# Altium PCB PCB1.PcbDoc
Units mm, origin at the board's own origin, x right, y up, seen from the top; angles counter-clockwise.
Board outline 200 x 200 mm, 4 copper layers (Top Layer, Internal Plane 1, Internal Plane 2, Bottom Layer), stack 0.462 mm thick; 21 components, 52 nets, 105 pads, 0 vias.
Unrouted connection lines stored in the file: 5.
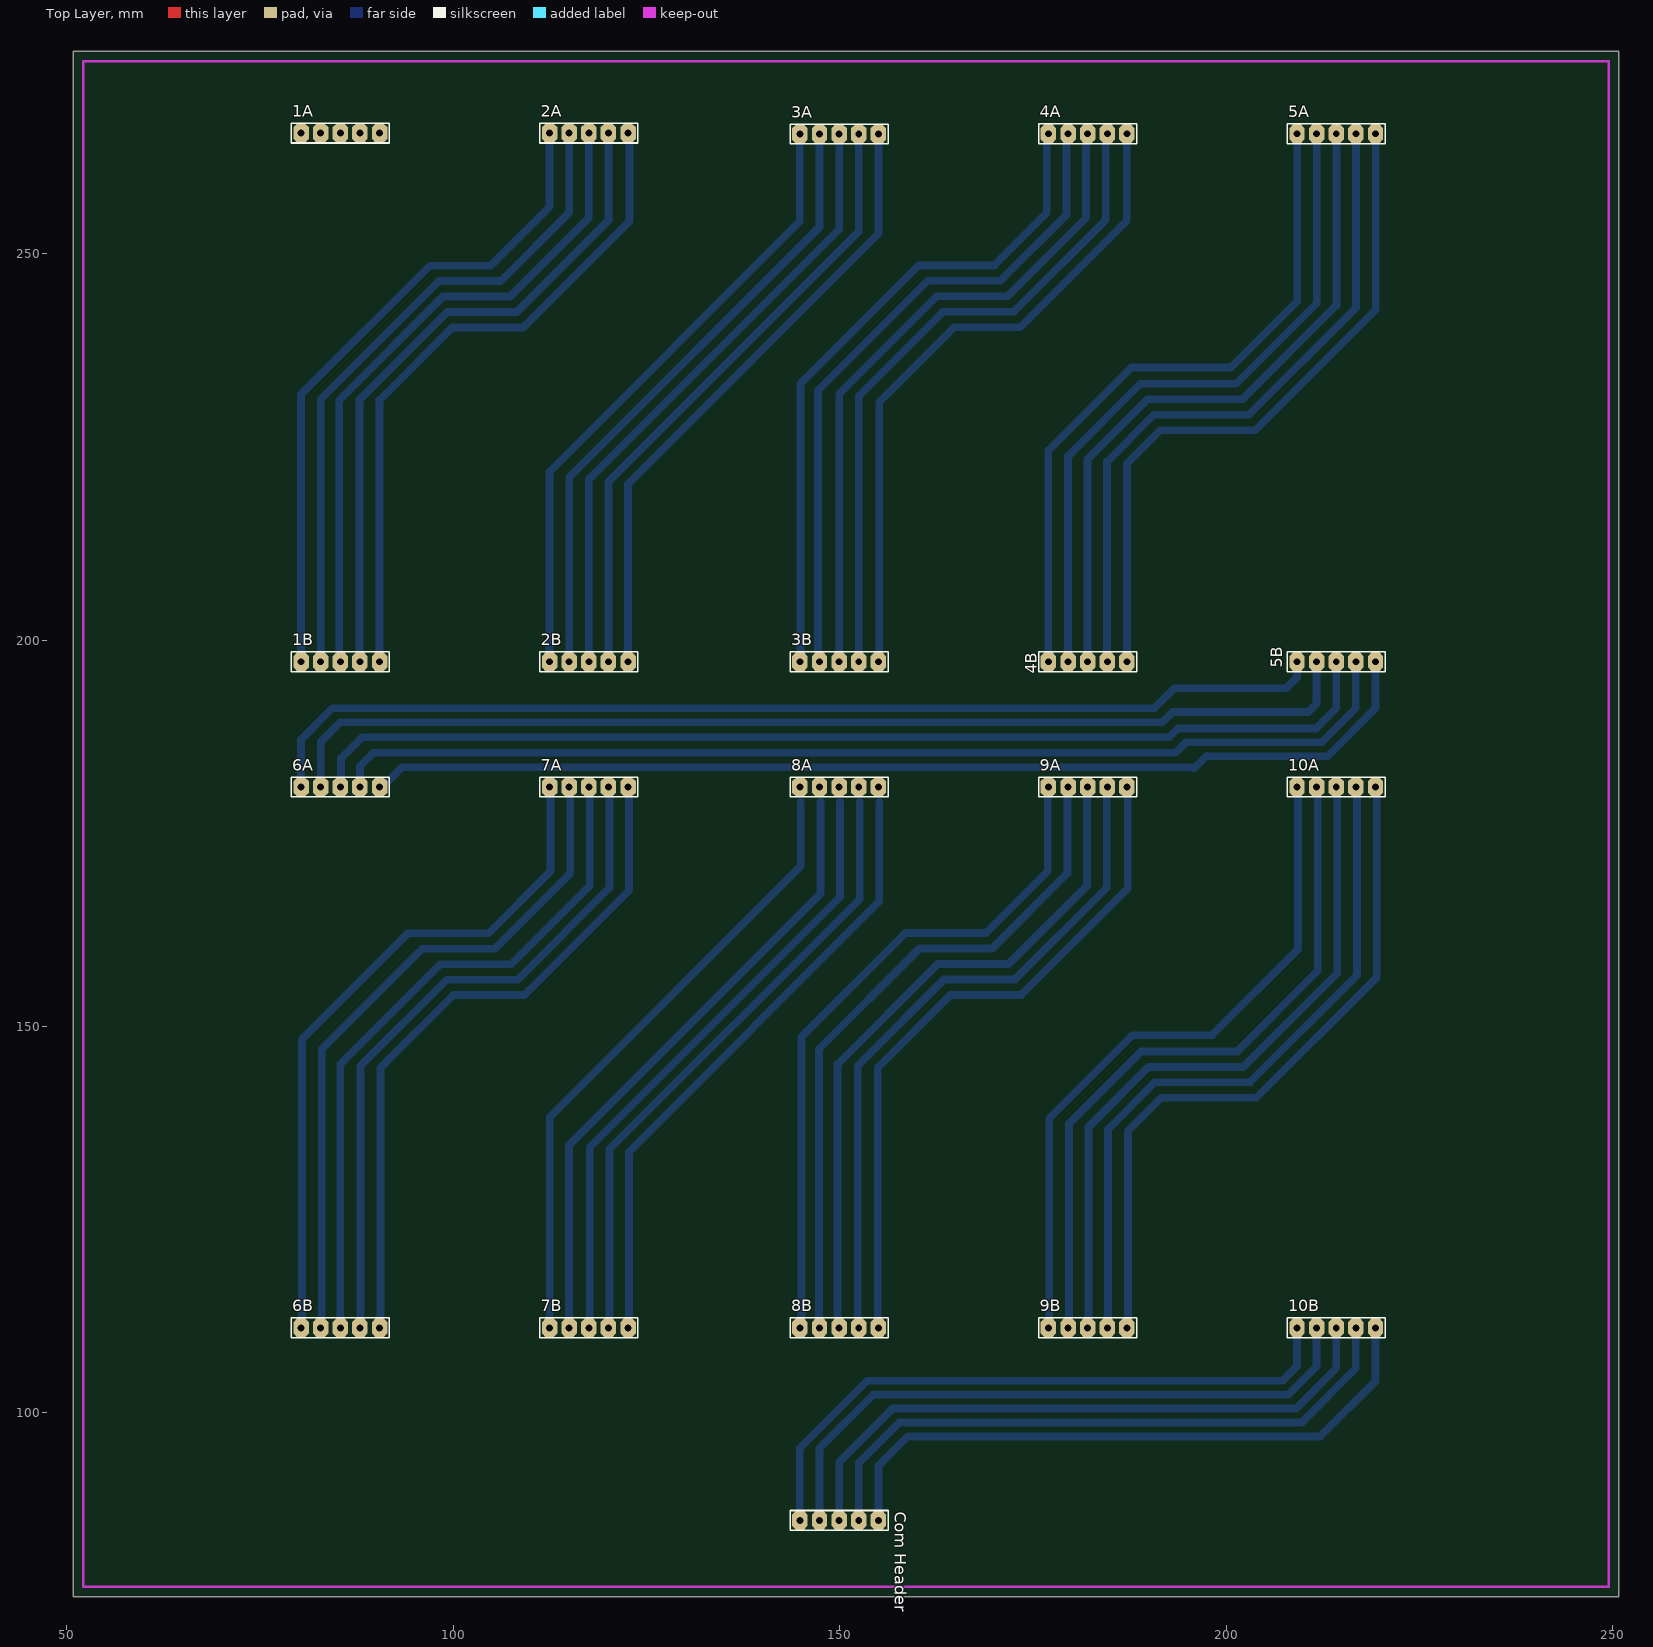
[diagram p0: Top Layer view]
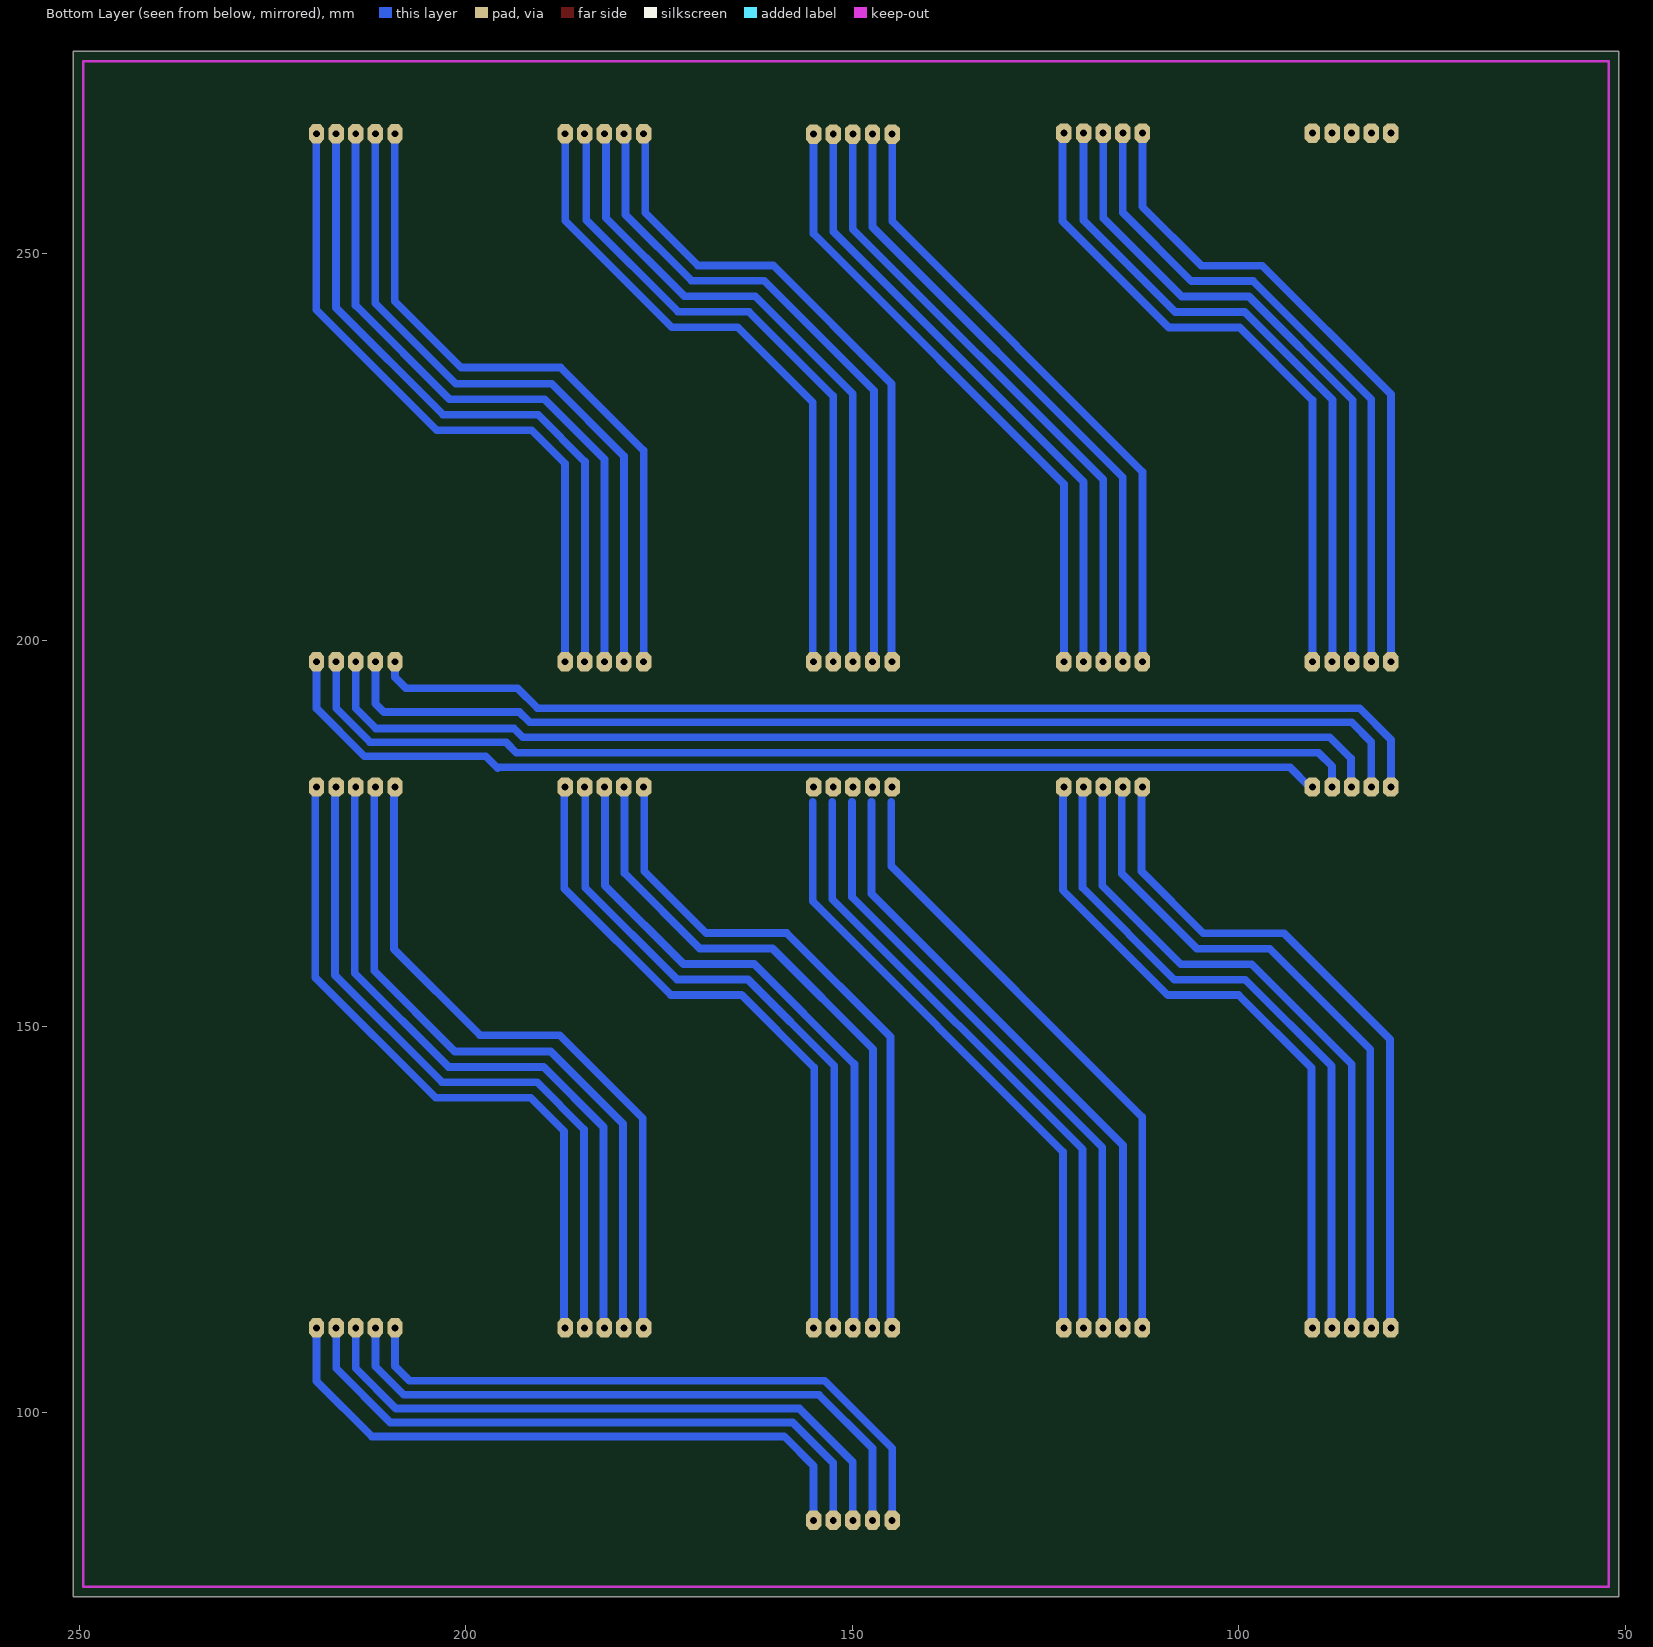
[diagram p1: Bottom Layer view, seen from below]
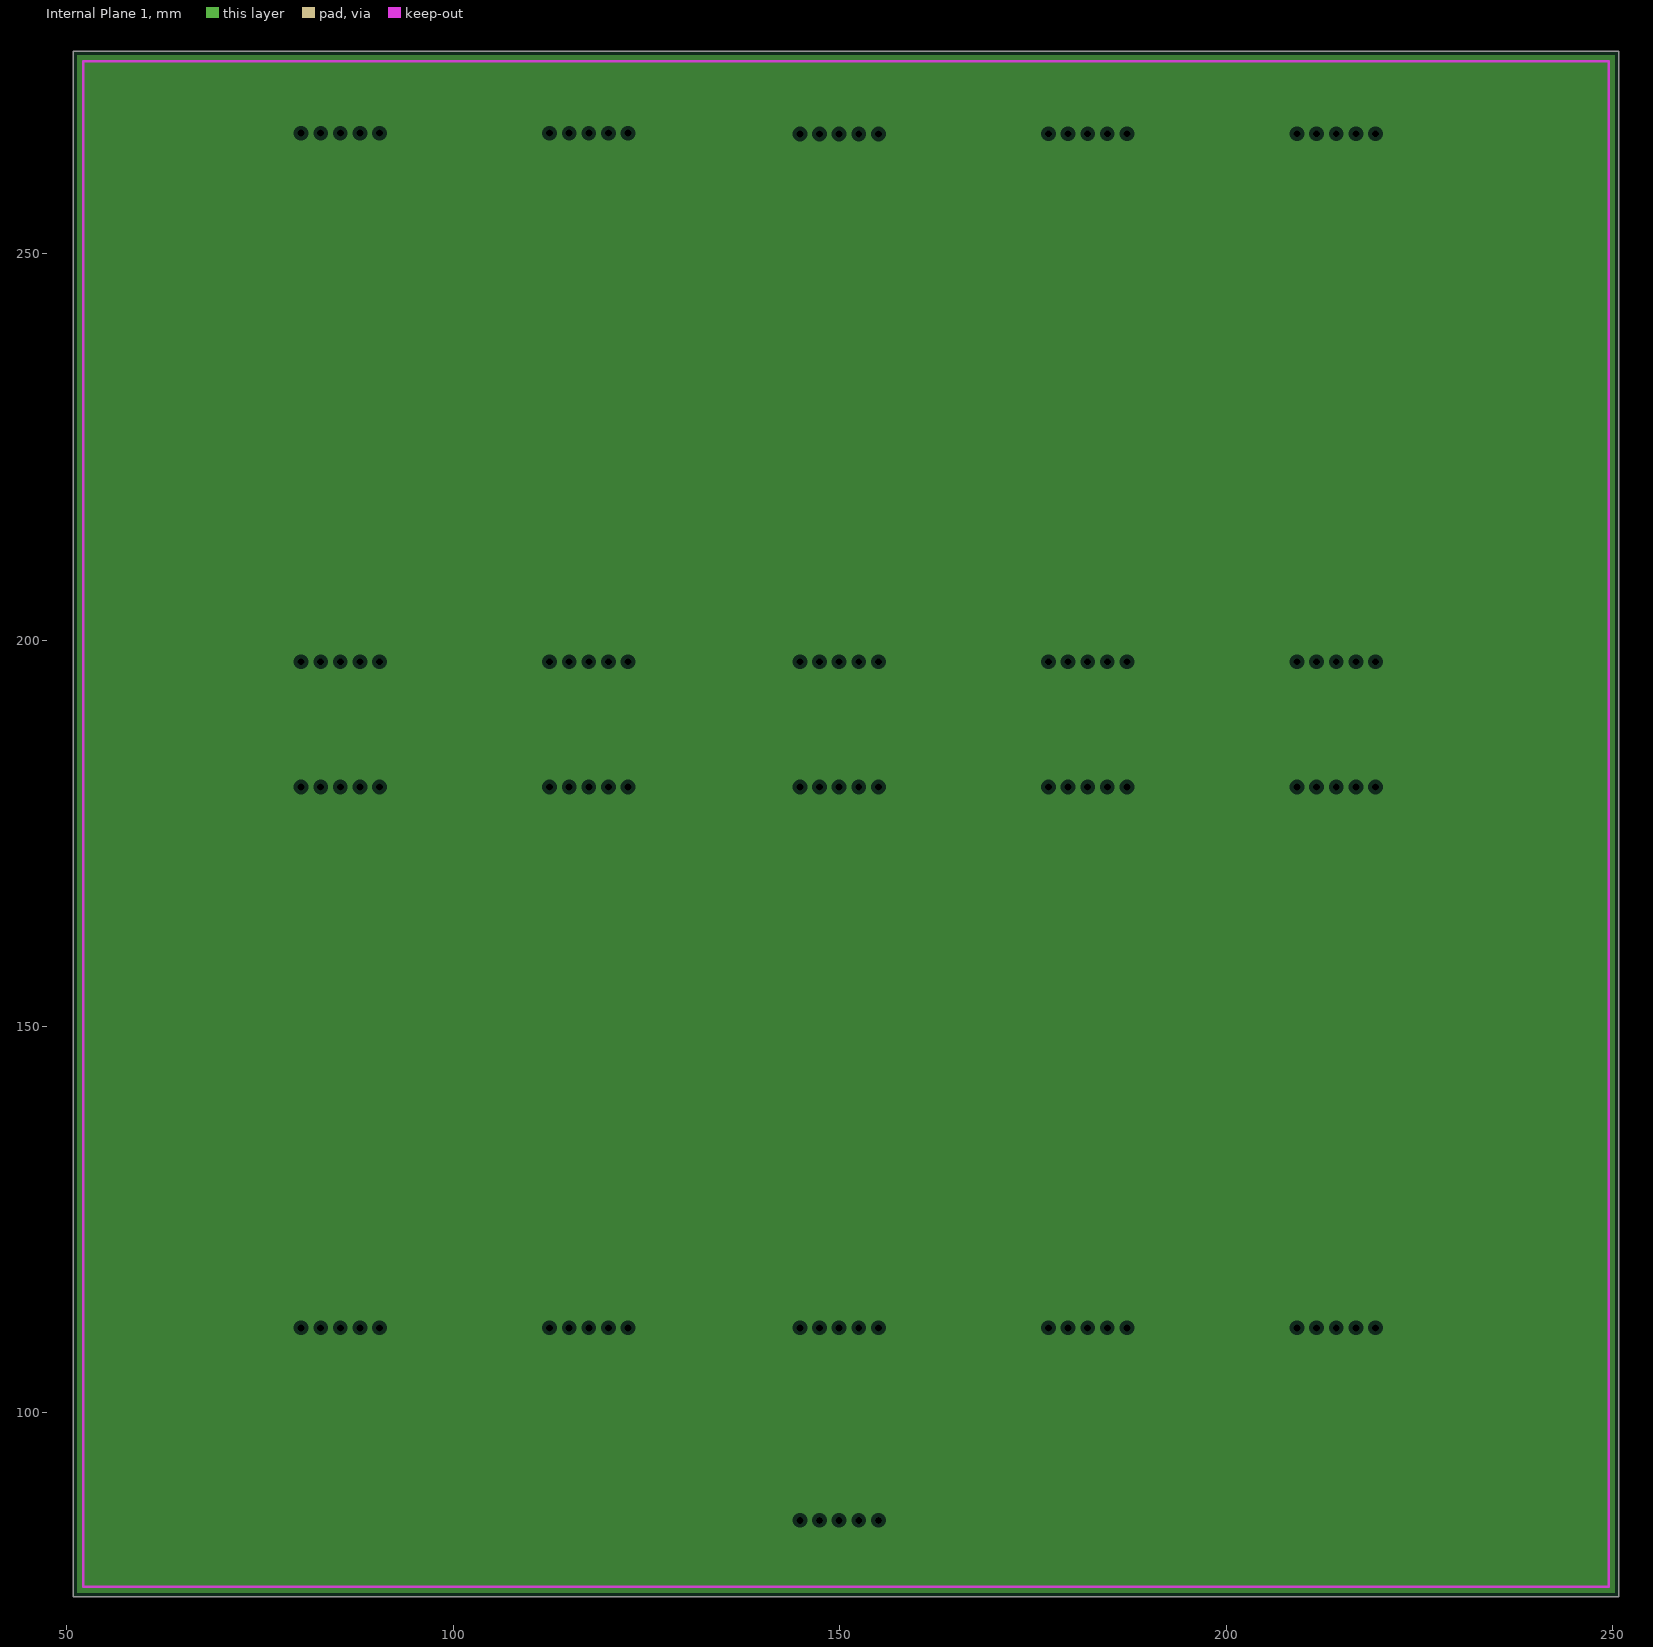
[diagram p2: Internal Plane 1, clearances drawn from the general rule]
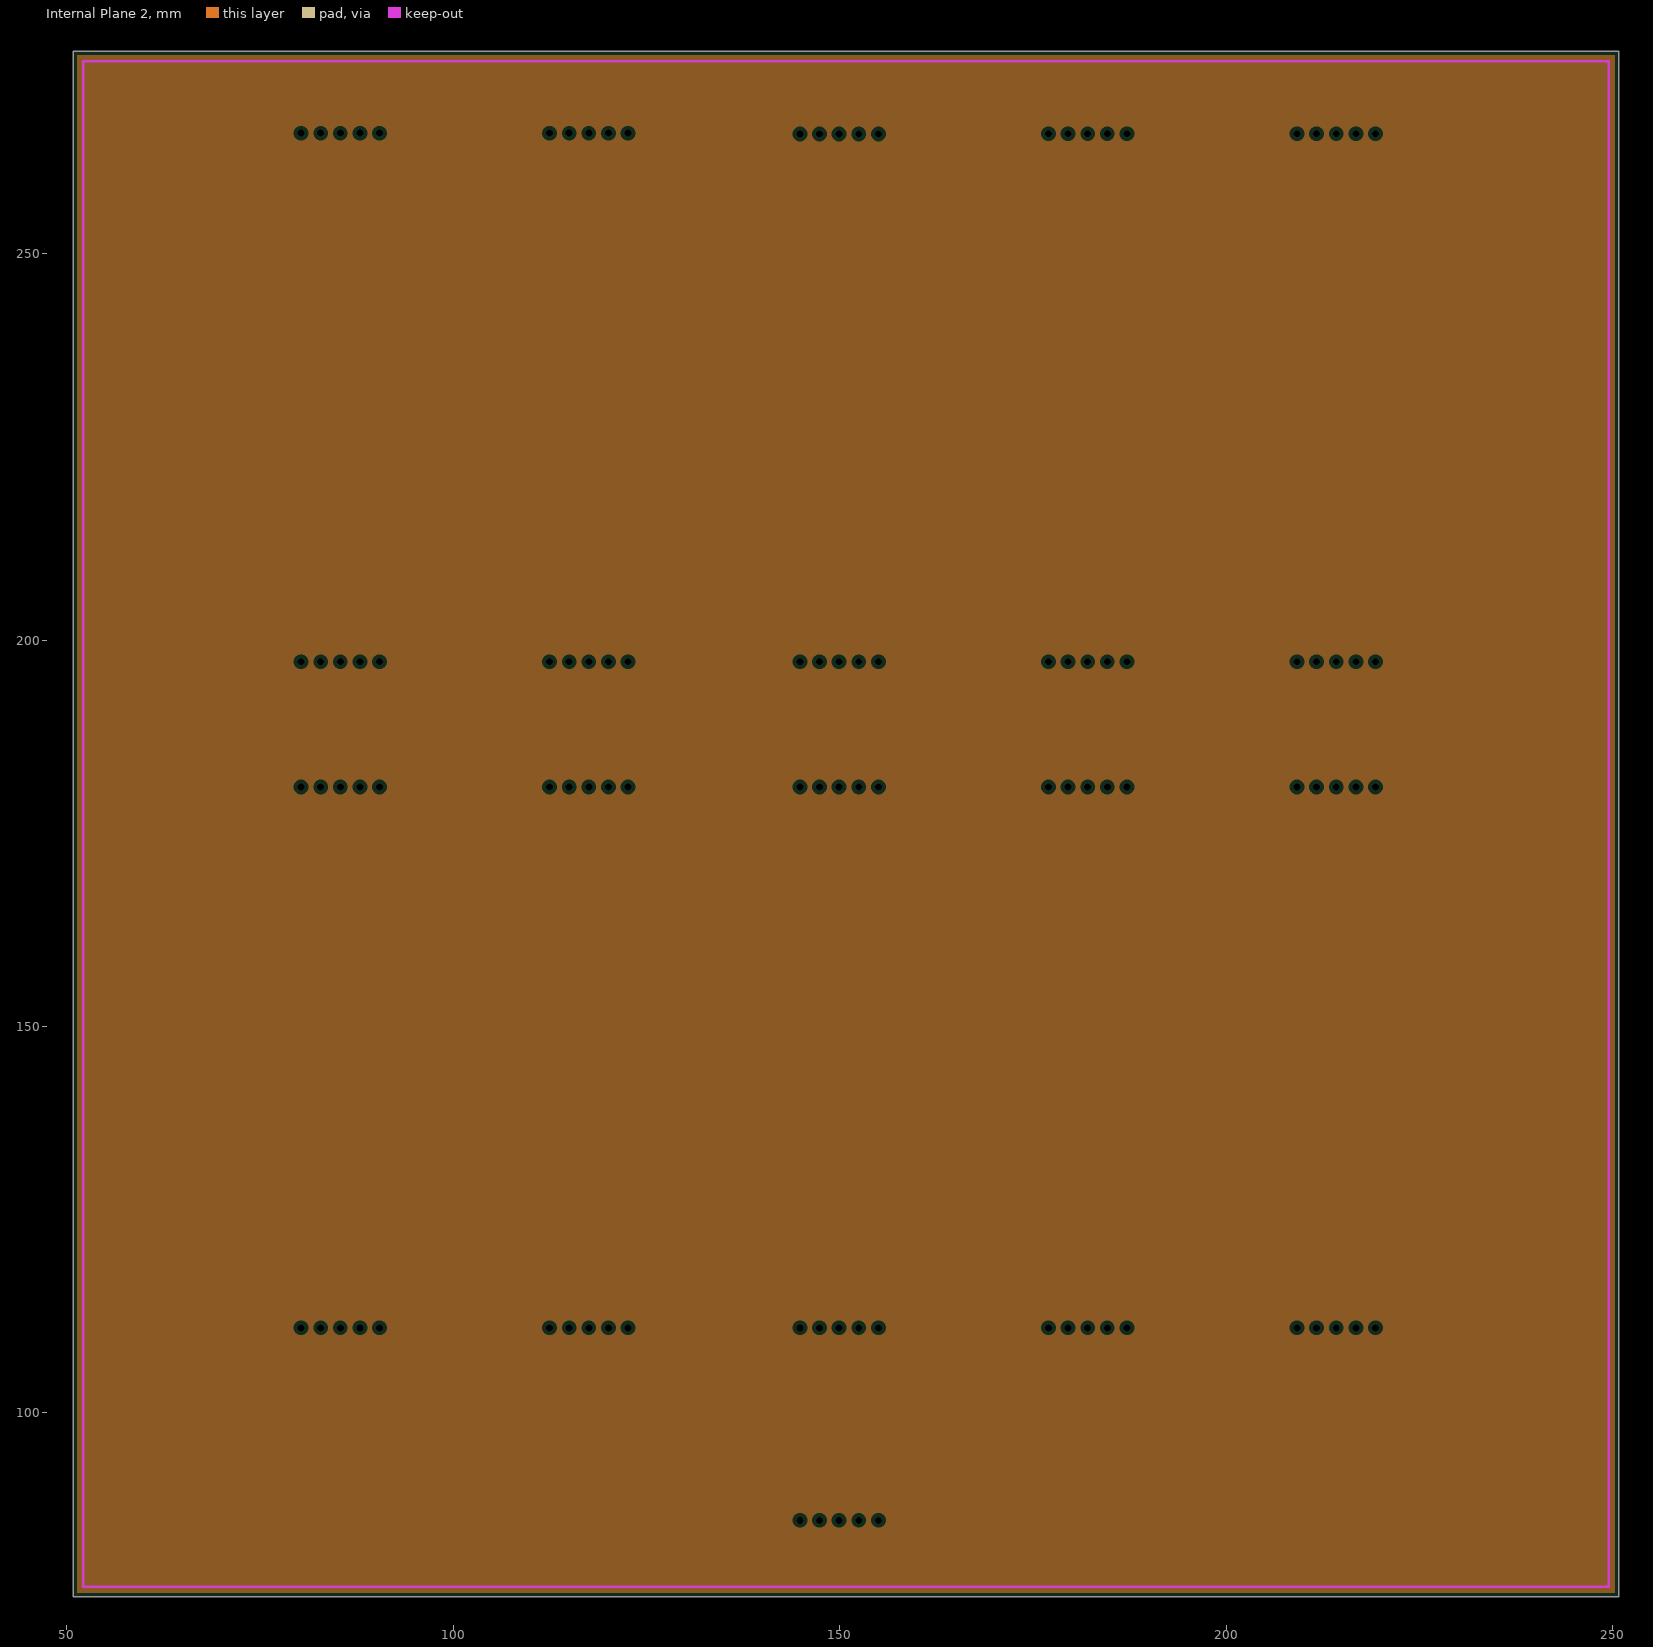
[diagram p3: Internal Plane 2, clearances drawn from the general rule]

## Layer stack, top to bottom
Top Solder: solder mask 0.0102, Solder Resist, Dk 3.5
Top Layer: signal copper 0.0356
Internal Plane 1: plane copper 0.0356
Internal Plane 2: plane copper 0.0356
Dielectric 1: dielectric 0.32, FR-4, Dk 4.8
Bottom Layer: signal copper 0.0356
Bottom Solder: solder mask 0.0102, Solder Resist, Dk 3.5

## Board outline
50.8,76.2 250.8,76.2 250.8,276.2 50.8,276.2

## Design rules (kind name [scope] priority, off if disabled: settings)
Clearance [All] p1: gap=0.8
PlaneClearance [All] p1: clearance=0.508
PlaneConnect [All] p1: planeconnectstyle=Relief reliefexpansion=0.508 reliefentries=4 reliefconductorwidth=0.254 reliefairgap=0.254
PolygonConnect [All] p1: connectstyle=Relief reliefconductorwidth=0.254 reliefentries=4 polygonreliefangle="90 Angle" airgapwidth=0.254
RoomDefinition Sheet1 [InComponentClass('Sheet1')] p1: confinementstyle=ConfineIn formatcopy=TRUE lockcomponents=FALSE outline 0,0 50.8,0 50.8,25.4 0,25.4
RoutingVias [All] p1: holewidth=0.6 width=1 viastyle="Through Hole" minholewidth=0.711 minwidth=1.27 maxholewidth=0.711 maxwidth=1.27
SolderMaskExpansion [All] p1: expansion=0.102
Width [All] p1: maxlimit=1 minlimit=0.5 preferedwidth=0.5
28 further rules are at their usual default settings.

## Components (designator, comment, footprint, x,y, rotation, side; value= is the part's Value field where it differs from the comment)
1A "Header 5" HDR1X5 80.289,265.583 r0 top
1B "Header 5" HDR1X5 90.449,197.191 r180 top
2A "Header 5" HDR1X5 112.446,265.583 r0 top
2B "Header 5" HDR1X5 122.606,197.191 r180 top
3A "Header 5" HDR1X5 144.831,265.456 r0 top
3B "Header 5" HDR1X5 154.991,197.191 r180 top
4A "Header 5" HDR1X5 176.99,265.506 r0 top
4B "Header 5" HDR1X5 187.15,197.191 r180 top
5A "Header 5" HDR1X5 209.15,265.506 r0 top
5B "Header 5" HDR1X5 219.31,197.191 r180 top
6A "Header 5" HDR1X5 80.289,180.98 r0 top
6B "Header 5" HDR1X5 90.449,111.017 r180 top
7A "Header 5" HDR1X5 112.446,180.98 r0 top
7B "Header 5" HDR1X5 122.606,111.017 r180 top
8A "Header 5" HDR1X5 144.831,180.98 r0 top
8B "Header 5" HDR1X5 154.991,111.017 r180 top
9A "Header 5" HDR1X5 176.99,180.98 r0 top
9B "Header 5" HDR1X5 187.15,111.017 r180 top
10A "Header 5" HDR1X5 209.15,180.98 r0 top
10B "Header 5" HDR1X5 219.31,111.017 r180 top
"Com Header" "Header 5" HDR1X5 144.831,86.106 r0 top

## Footprints (in the part's own frame and the unit in brackets; to place one, negate y for a bottom-side part, rotate by r counter-clockwise, add the part's x,y. Pads: shape width x height; smd on the part's side, far side on the other; paste and mask are expansions set on the pad)
HDR1X5 [mm] "Connector; Header; 5 Position"
  oct 2x2.5 hole 0.9: 1(0,0) 2(2.54,0) 3(5.08,0) 4(7.62,0) 5(10.16,0)
  silkscreen extent -1.27,-1.27 11.43,1.27

## Part data
1A 1B 2A 2B 3A 3B 4A 4B 5A 5B 6A 6B 7A 7B 8A 8B 9A 9B 10A 10B "Com Header": "Header, 5-Pin"

## Nets (pads, with @x,y where several pads share a name; then routed paths per layer and width w, separated by ;. In a path a pad name is that pad's centre, name@x,y a point inside that pad or via, vN(x,y) a via of type N, cw(c..) or ccw(c..) an arc to the next point about the centre after c; other vN are vias at no path point)
CLK: 10B.1 "Com Header.5" | length 82.8
  Bottom Layer w1: 154.991,86.106 154.991,93.142 158.811,96.962 212.151,96.962 219.31,104.121 10B.1
CS: 10B.2 "Com Header.4" | length 82.1
  Bottom Layer w1: 152.451,86.106 152.451,93.523 157.69,98.762 209.766,98.762 216.77,105.767 10B.2
DIN: 10B.3 "Com Header.3" | length 82.1
  Bottom Layer w1: 149.911,86.106 149.911,93.65 156.823,100.562 209.02,100.562 214.23,105.772 10B.3
GND: 10B.4 "Com Header.2" | length 83
  Bottom Layer w1: 147.371,86.106 147.371,95.428 154.305,102.362 208.026,102.362 211.69,106.026 10B.4
Net1B_1: 1B.1 2A.5 | length 87.2
  Bottom Layer w1: 1B.1 90.449,231.046 99.85,240.446 109.019,240.446 122.784,254.211 122.784,265.405 2A.5
Net1B_2: 1B.2 2A.4 | length 86.9
  Bottom Layer w1: 1B.2@87.859,197.242 87.859,231.103 99.201,242.446 108.191,242.446 120.066,254.321 2A.4
Net1B_3: 1B.3 2A.3 | length 86.4
  Bottom Layer w1: 1B.3@85.242,197.644 85.242,231.033 98.656,244.446 107.362,244.446 117.526,254.61 2A.3
Net1B_4: 1B.4 2A.2 | length 86.4
  Bottom Layer w1: 1B.4 82.829,231.165 98.11,246.446 106.111,246.446 114.986,255.321 2A.2
Net1B_5: 1B.5 2A.1 | length 86.3
  Bottom Layer w1: 1B.5 80.289,231.8 96.935,248.446 104.809,248.446 112.446,256.083 2A.1
Net2B_1: 2B.1 3A.5 | length 81.7
  Bottom Layer w1: 2B.1 122.606,220.193 154.991,252.578 3A.5
Net2B_2: 2B.2 3A.4 | length 81.7
  Bottom Layer w1: 2B.2 120.066,220.481 152.451,252.866 3A.4
Net2B_3: 2B.3 3A.3 | length 81.7
  Bottom Layer w1: 2B.3 117.526,220.769 149.911,253.154 3A.3
Net2B_4: 2B.4 3A.2 | length 81.7
  Bottom Layer w1: 2B.4 114.986,221.058 147.371,253.443 3A.2
Net2B_5: 2B.5 3A.1 | length 81.7
  Bottom Layer w1: 2B.5 112.446,221.793 144.831,254.178 3A.1
Net3B_1: 3B.1 4A.5 | length 86.9
  Bottom Layer w1: 3B.1@154.788,197.216 155.118,197.547 155.118,230.759 164.83,240.472 173.357,240.472 187.122,254.236 187.122,265.431 4A.5@186.944,265.608
Net3B_2: 3B.2 4A.4 | length 87
  Bottom Layer w1: 3B.2 152.451,231.563 163.36,242.472 172.529,242.472 184.404,254.347 4A.4@184.404,265.608
Net3B_3: 3B.3 4A.3 | length 87
  Bottom Layer w1: 3B.3 149.911,231.851 162.531,244.472 171.701,244.472 181.864,254.635 4A.3@181.864,265.608
Net3B_4: 3B.4 4A.2 | length 87.2
  Bottom Layer w1: 3B.4@147.168,197.216 147.168,232.258 161.382,246.472 170.78,246.472 179.324,255.016 4A.2@179.324,265.608
Net3B_5: 3B.5 4A.1 | length 87.4
  Bottom Layer w1: 3B.5@144.628,197.216 144.907,197.496 144.907,233.172 160.207,248.472 169.986,248.472 176.784,255.27 4A.1@176.784,265.608
Net4B_1: 4B.1 5A.5 | length 88.9
  Bottom Layer w1: 4B.1@186.944,197.216 187.147,197.42 187.147,222.831 191.471,227.155 203.763,227.155 219.329,242.721 5A.5@219.329,265.481
Net4B_2: 4B.2 5A.4 | length 88.9
  Bottom Layer w1: 4B.2@184.404,197.216 184.582,197.394 184.582,223.094 190.643,229.155 202.935,229.155 216.789,243.009 5A.4@216.789,265.481
Net4B_3: 4B.3 5A.3 | length 88.9
  Bottom Layer w1: 4B.3@181.864,197.216 182.042,197.394 182.042,223.382 189.814,231.155 202.106,231.155 214.249,243.298 5A.3@214.249,265.481
Net4B_4: 4B.4 5A.2 | length 88.9
  Bottom Layer w1: 4B.4@179.324,197.216 179.527,197.42 179.527,223.799 188.883,233.155 201.278,233.155 211.709,243.586 5A.2@211.709,265.481
Net4B_5: 4B.5 5A.1 | length 89.2
  Bottom Layer w1: 4B.5@176.784,197.216 176.962,197.394 176.962,224.511 187.706,235.255 200.584,235.255 209.169,243.84 5A.1@209.169,265.481
Net5B_1: 5B.1 6A.5 | length 139.2
  Bottom Layer w1: 6A.5 90.81,180.98 93.36,183.53 195.762,183.53 195.872,183.42 197.421,184.97 213.124,184.97 219.31,191.156 5B.1
Net5B_2: 5B.2 6A.4 | length 140.7
  Bottom Layer w1: 6A.4 87.909,183.662 89.668,185.42 193.448,185.42 194.798,186.77 212.378,186.77 216.77,191.162 5B.2
Net5B_3: 5B.3 6A.3 | length 141.2
  Bottom Layer w1: 6A.3 85.471,181.081 85.471,184.697 88.194,187.42 192.62,187.42 193.769,188.57 211.633,188.57 214.23,191.167 5B.3
Net5B_4: 5B.4 6A.2 | length 142.2
  Bottom Layer w1: 6A.2 82.829,186.808 85.382,189.36 191.732,189.36 193.049,190.678 210.579,190.678 211.69,191.789 5B.4
Net5B_5: 5B.5 6A.1 | length 140.3
  Bottom Layer w1: 6A.1 80.289,187.096 84.353,191.16 190.703,191.16 193.305,193.762 207.732,193.762 209.15,195.18 5B.5
Net6B_1: 6B.1 7A.5 | length 88.7
  Bottom Layer w1: 6B.1@90.576,110.806 90.576,144.66 99.977,154.061 109.146,154.061 122.733,167.647 7A.5@122.733,180.853
Net6B_2: 6B.2 7A.4 | length 88.7
  Bottom Layer w1: 6B.2@87.986,110.856 87.986,144.898 99.148,156.061 108.318,156.061 120.193,167.936 7A.4@120.193,180.853
Net6B_3: 6B.3 7A.3 | length 88.3
  Bottom Layer w1: 6B.3@85.369,111.259 85.369,145.11 98.32,158.061 107.489,158.061 117.653,168.224 7A.3@117.653,180.853
Net6B_4: 6B.4 7A.2 | length 88.9
  Bottom Layer w1: 6B.4@82.956,110.806 82.956,147.041 95.976,160.061 105.384,160.061 115.113,169.79 7A.2@115.113,180.853
Net6B_5: 6B.5 7A.1 | length 89.6
  Bottom Layer w1: 6B.5@80.416,110.806 80.416,148.341 94.136,162.061 104.555,162.061 112.573,170.078 112.573,180.853 7A.1
Net7B_1: 7B.1 8A.5 | length 81.7
  Bottom Layer w1: 7B.1@122.733,110.806 122.733,133.807 155.118,166.192 155.118,179.071
Net7B_2: 7B.2 8A.4 | length 81.7
  Bottom Layer w1: 7B.2@120.193,110.806 120.193,134.096 152.578,166.481 152.578,179.071
Net7B_3: 7B.3 8A.3 | length 81.7
  Bottom Layer w1: 7B.3@117.653,110.806 117.653,134.384 150.038,166.769 150.038,179.071
Net7B_4: 7B.4 8A.2 | length 81.7
  Bottom Layer w1: 7B.4@114.96,110.82 114.96,134.645 147.498,167.183 147.498,179.071
Net7B_5: 7B.5 8A.1 | length 81.7
  Bottom Layer w1: 7B.5@112.471,110.82 112.471,138.278 144.958,170.764 144.958,179.071
Net8B_1: 8B.1 9A.5 | length 88.9
  Bottom Layer w1: 8B.1@154.915,110.831 154.915,144.686 164.315,154.086 173.484,154.086 187.249,167.851 187.249,180.722 9A.5@187.071,180.9
Net8B_2: 8B.2 9A.4 | length 88.7
  Bottom Layer w1: 8B.2@152.324,110.882 152.324,144.923 163.487,156.086 172.656,156.086 184.531,167.961 9A.4@184.531,180.9
Net8B_3: 8B.3 9A.3 | length 88.4
  Bottom Layer w1: 8B.3@149.708,111.284 149.708,145.136 162.658,158.086 171.828,158.086 181.991,168.25 9A.3@181.991,180.9
Net8B_4: 8B.4 9A.2 | length 88.9
  Bottom Layer w1: 8B.4@147.295,110.831 147.295,147.067 160.314,160.086 169.722,160.086 179.451,169.815 9A.2@179.451,180.9
Net8B_5: 8B.5 9A.1 | length 89.5
  Bottom Layer w1: 8B.5@144.755,110.831 145.034,111.11 145.034,148.646 158.475,162.086 168.893,162.086 176.911,170.104 9A.1@176.911,180.9
Net9B_1: 9B.1 10A.5 | length 90.6
  Bottom Layer w1: 9B.1@187.071,110.831 187.274,111.034 187.274,136.446 191.598,140.769 203.89,140.769 219.456,156.335 10A.5@219.456,180.834
Net9B_2: 9B.2 10A.4 | length 90.6
  Bottom Layer w1: 9B.2@184.531,110.831 184.709,111.009 184.709,136.709 190.77,142.769 203.062,142.769 216.916,156.624 10A.4@216.916,180.834
Net9B_3: 9B.3 10A.3 | length 90.6
  Bottom Layer w1: 9B.3@181.991,110.831 182.169,111.009 182.169,136.997 189.941,144.769 202.233,144.769 214.376,156.912 10A.3@214.376,180.834
Net9B_4: 9B.4 10A.2 | length 90.7
  Bottom Layer w1: 9B.4@179.451,110.831 179.654,111.034 179.654,137.414 189.01,146.769 201.405,146.769 211.836,157.201 10A.2@211.836,180.834
Net9B_5: 9B.5 10A.1 | length 89.5
  Bottom Layer w1: 9B.5@176.911,110.831 177.089,111.009 177.089,138.125 187.833,148.869 198.145,148.869 209.296,160.02 10A.1@209.296,180.834
NetBT'_4: 
NetBT'_5: 
VCC: 10B.5 "Com Header.1" | length 83
  Bottom Layer w1: 144.831,86.106 144.831,95.433 153.559,104.162 207.28,104.162 209.15,106.032 10B.5
pads on no net: 1A.1 1A.2 1A.3 1A.4 1A.5

## Keep-outs
Keep-Out Layer:
  lines w0.3: 52.1,77.5 52.1,274.9 249.5,274.9 249.5,77.5 52.1,77.5

## Dimensions
52.1,77.5 to 52.1,274.9 on Mechanical 1
52.1,77.5 to 249.5,77.5 on Mechanical 1